# Altium PCB bmsSlavePCB_L.PcbDoc (part 2 of 3)
Units mil, origin at the board's own origin, x right, y up, seen from the top; angles counter-clockwise.
Board outline 6375 x 5335 mil, 2 copper layers (Top Layer, Bottom Layer); 224 components, 153 nets, 536 pads, 45 vias.
Unrouted connection lines stored in the file: 34.
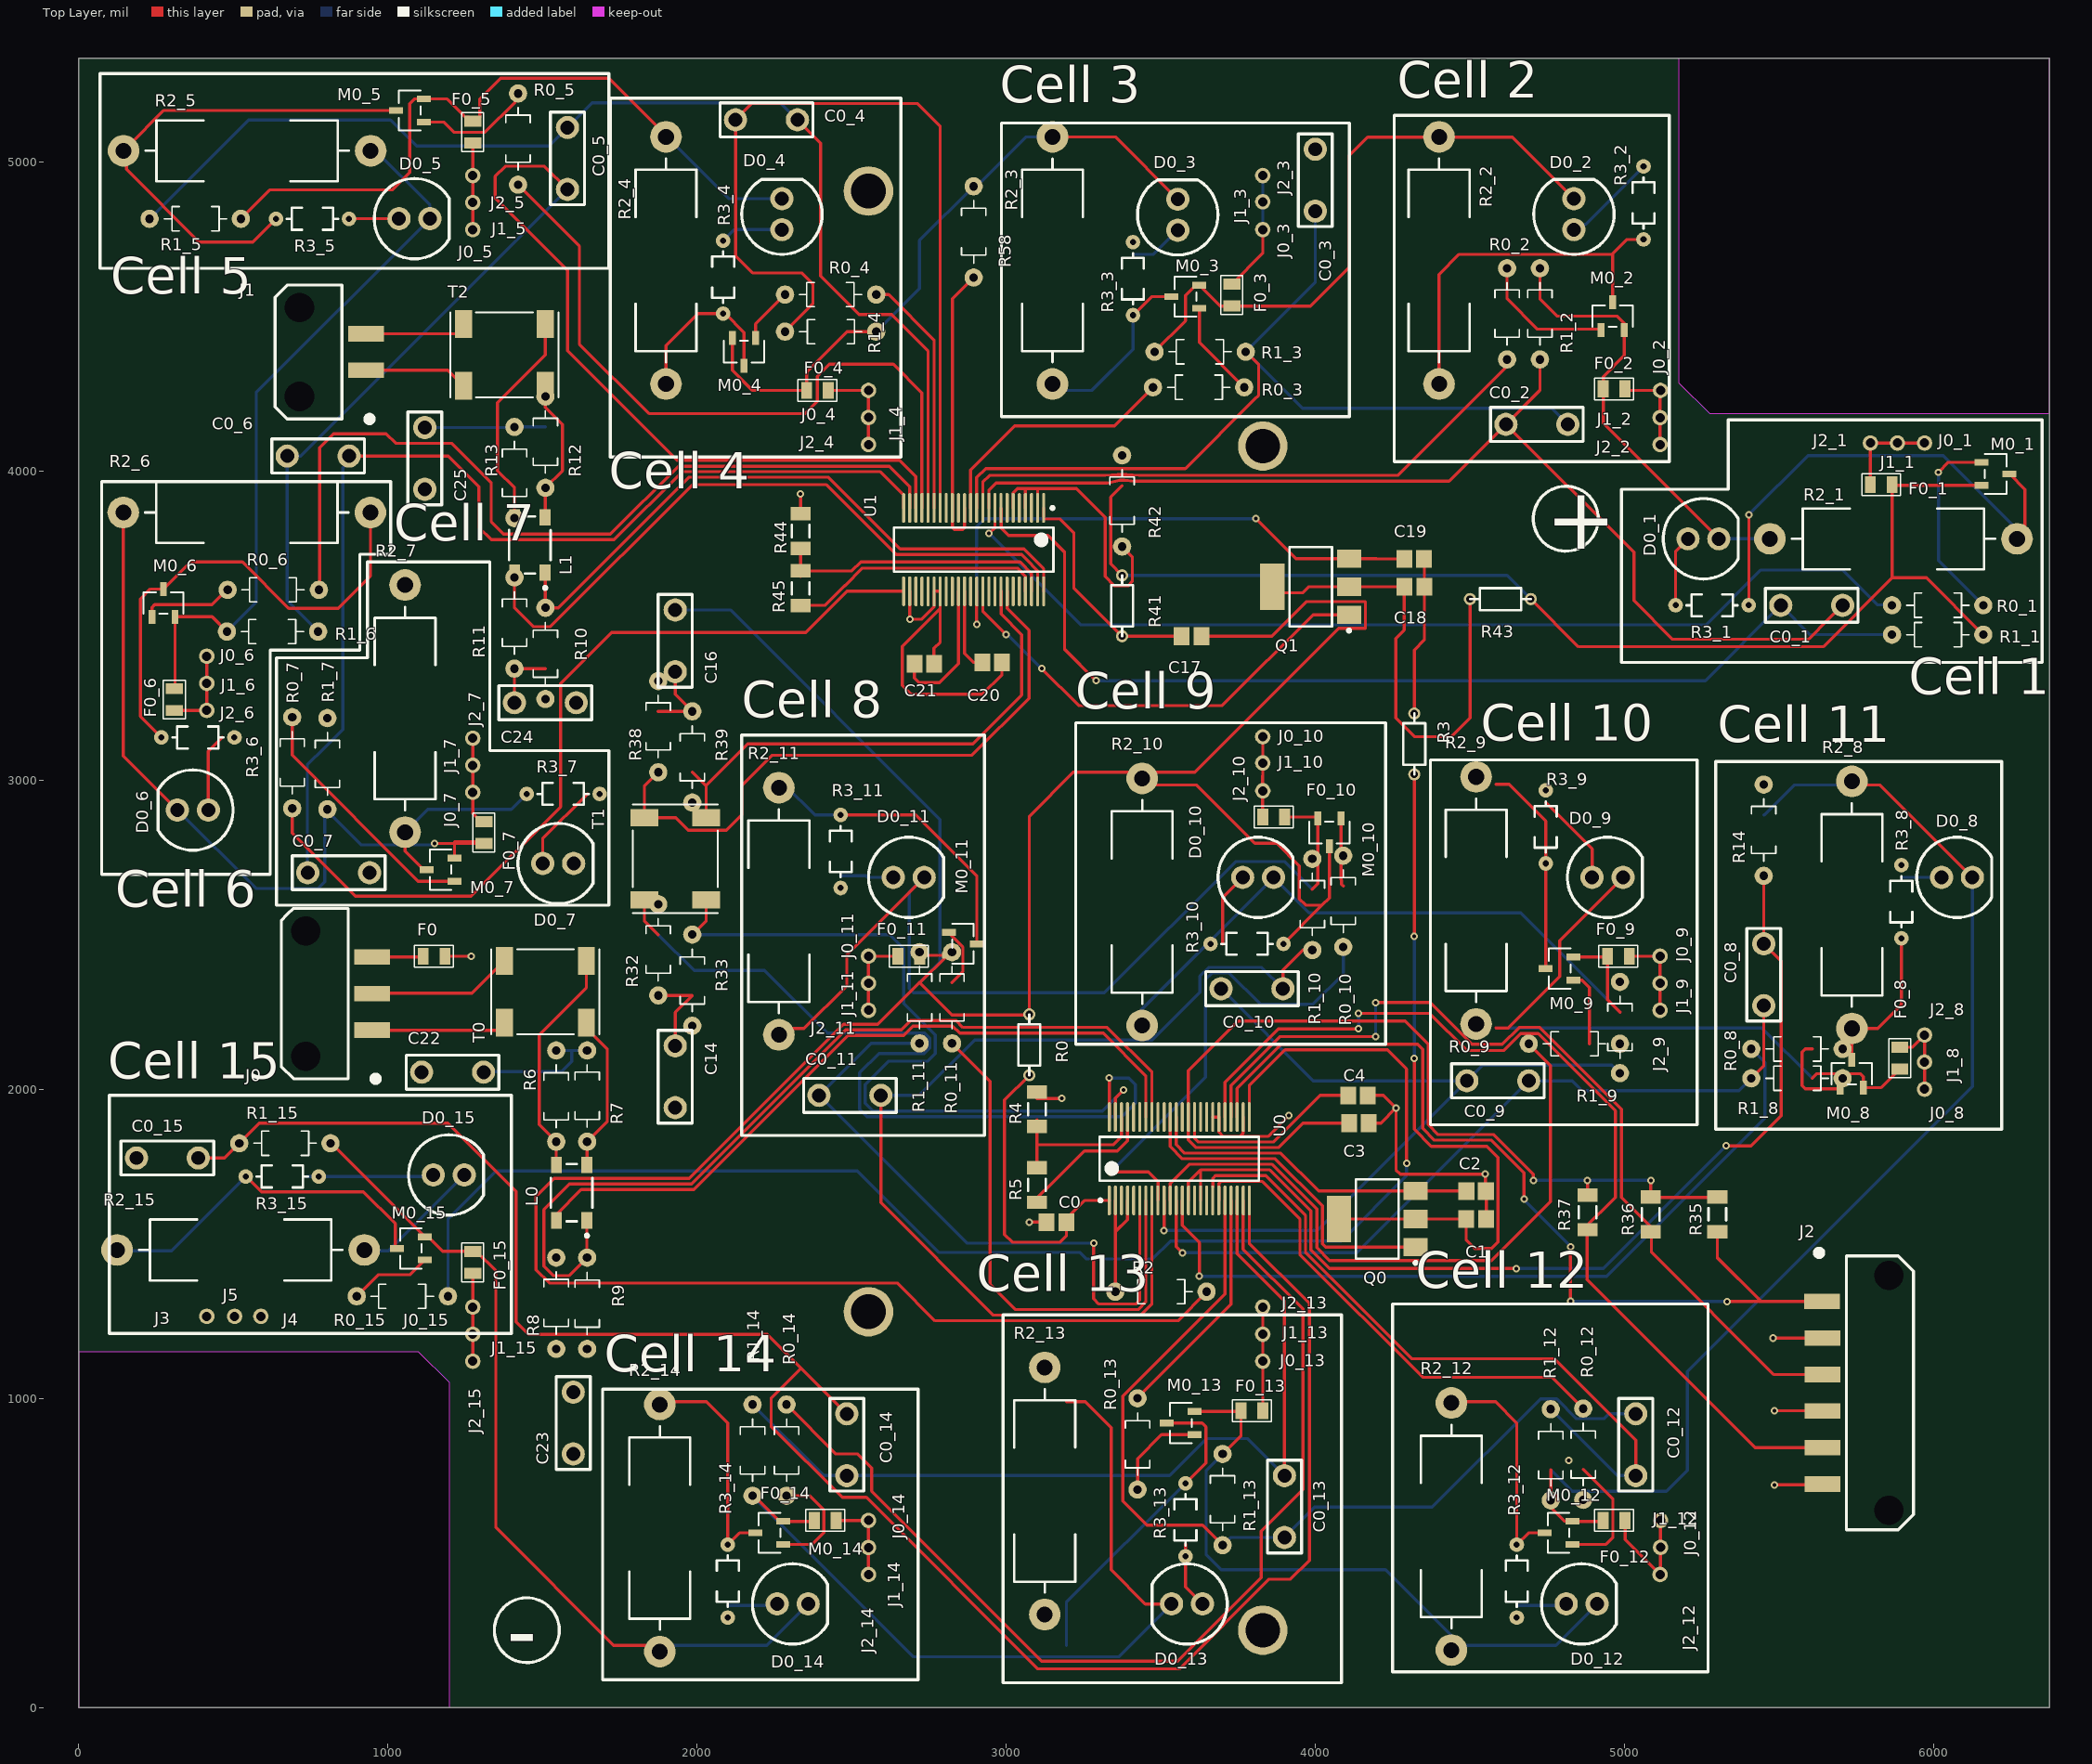
[diagram p0: Top Layer view]

## Via types
v1: diameter 24, hole 12, Top Layer to Bottom Layer, 45 vias

## Nets (pads, with @x,y where several pads share a name; then routed paths per layer and width w, separated by ;. In a path a pad name is that pad's centre, name@x,y a point inside that pad or via, vN(x,y) a via of type N, cw(c..) or ccw(c..) an arc to the next point about the centre after c; other vN are vias at no path point) (continued)
1-C10: (continued)
  Bottom Layer w10: R1_11.1@2720,2148.15 2563.15,2148.15 C0_11.2@2395,1980 2873,1502 v1(3283,1502)